# EAGLE board Bartosz_Nowakowski (EAGLE 9.6.0)
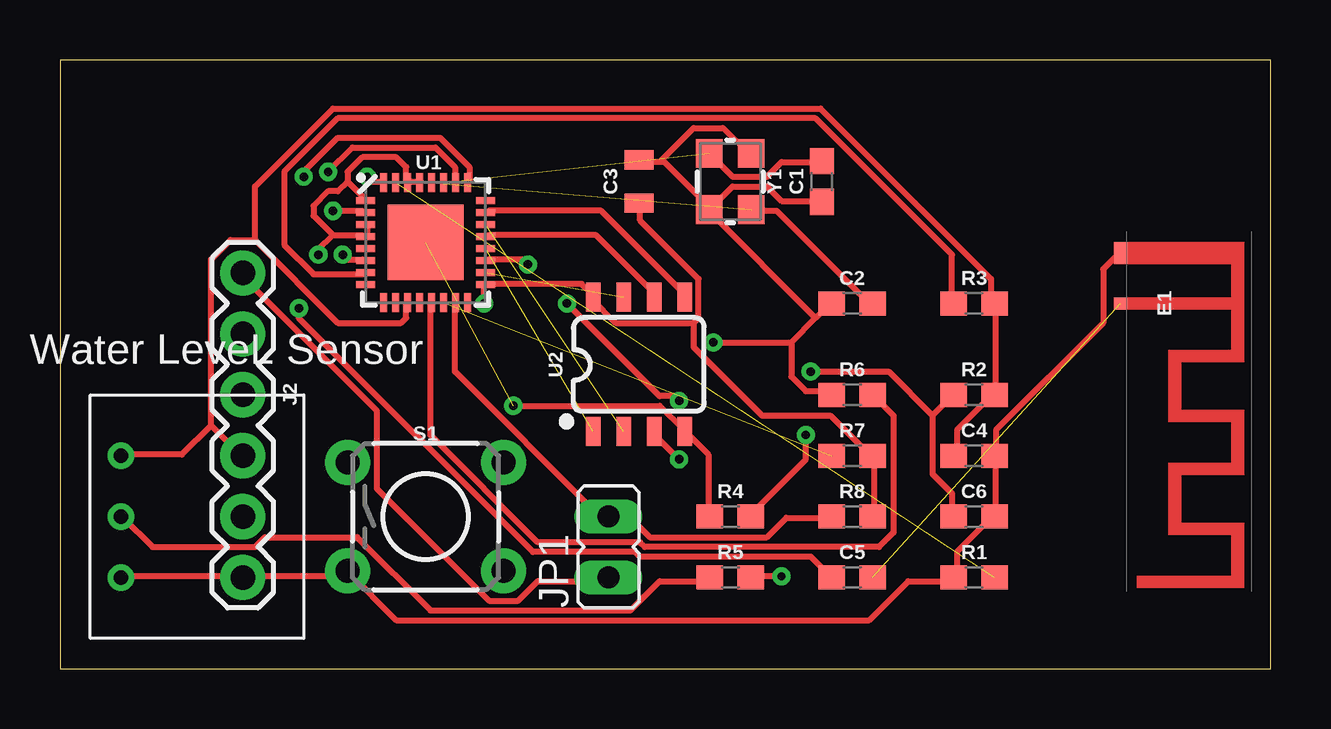
[diagram p0: board, top side]
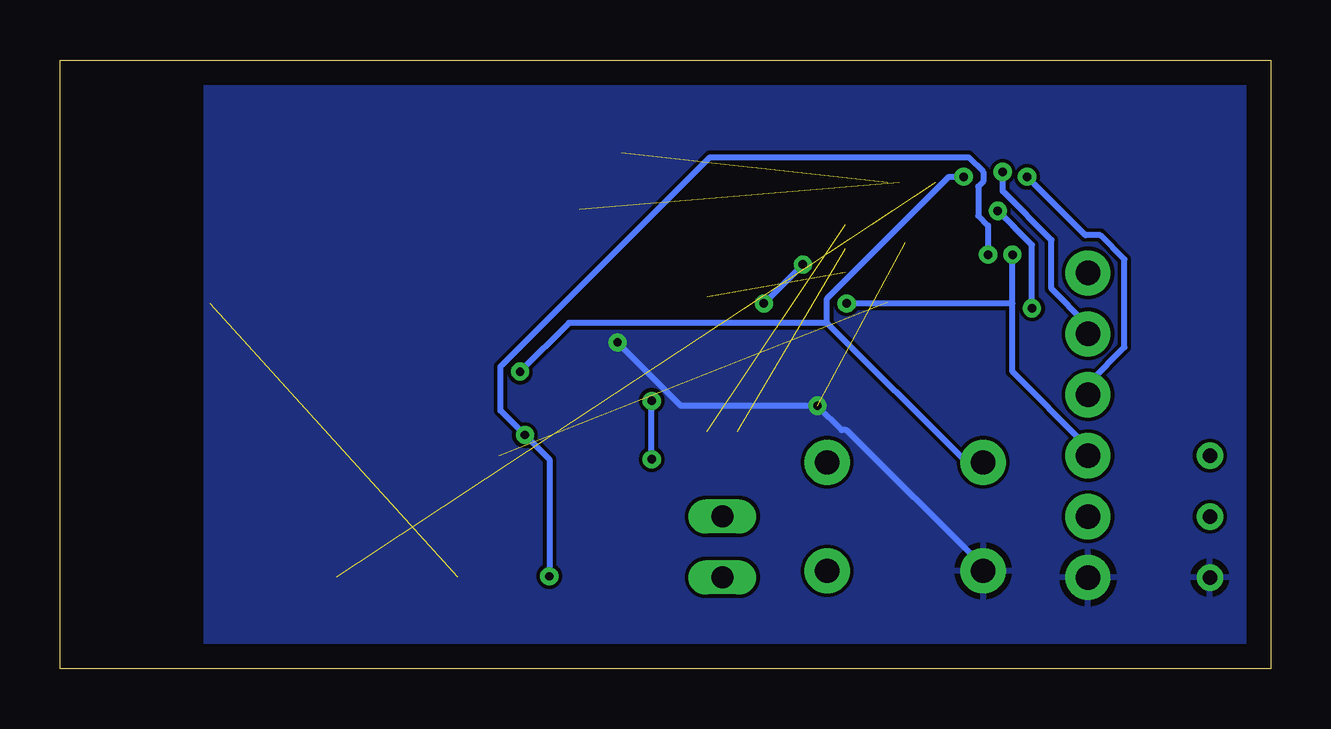
[diagram p1: board, bottom side, seen from below]

Size 50.47 x 25.39 mm. Coordinates in mm from the lower left corner, seen from the top.
Outline: 0,0 50.47,0 50.47,25.39 0,25.39 0,0
Copper layers (1*16): Top 0.035mm / dielectric 1.5mm / Bottom 0.035mm
Design rules "default *": minimum track width 10mil, minimum drill 0.35mm, track to track 6mil, track to pad 6mil, pad to pad 6mil, via to via 6mil, smd to smd 6mil, copper to edge 40mil, drill to drill 6mil, minimum pad ring 10mil, minimum via ring 8mil, stop-mask expansion 4mil, vias tented up to drill 0mil, thermal gap 10mil

## Footprints (pad centres in the part's own frame; a part is rotated, then mirrored left to right if it is on the bottom)
0603 = smd 1.1 x 1: 1 -0.85,0; 2 0.85,0
0805 = smd 0.8 x 1.2: 1 -0.9,0; 2 0.9,0
TRACE_ANTENNA_2.4GHZ_15.2MM = smd 0.5 x 0.5: ANT 0,-0.25 | smd 0.9 x 0.5: GND -2.1,-0.25
FTDI_BASIC = drill 1.016 pad 1.88: CTS 10.16,0; DTR 0,0; GND 12.7,0; RXI 2.54,0; TXO 5.08,0; VCC 7.62,0
JP1 = drill 0.914 long: 1 0,-1.27; 2 0,1.27
TACTILE_SWITCH_PTH_6.0MM_KIT = drill 1.016 pad 1.88: 1 -3.251,2.261; 2 3.251,2.261; 3 -3.251,-2.261; 4 3.251,-2.261
QFN32-5X5MM = smd 0.8 x 0.285: 1 -2.5,1.75; 2 -2.5,1.25; 3 -2.5,0.75; 4 -2.5,0.25; 5 -2.5,-0.25; 6 -2.5,-0.75; 7 -2.5,-1.25; 8 -2.5,-1.75; 17 2.5,-1.75; 18 2.5,-1.25; 19 2.5,-0.75; 20 2.5,-0.25; 21 2.5,0.25; 22 2.5,0.75; 23 2.5,1.25; 24 2.5,1.75 | smd 0.285 x 0.8: 9 -1.75,-2.5; 10 -1.25,-2.5; 11 -0.75,-2.5; 12 -0.25,-2.5; 13 0.25,-2.5; 14 0.75,-2.5; 15 1.25,-2.5; 16 1.75,-2.5; 25 1.75,2.5; 26 1.25,2.5; 27 0.75,2.5; 28 0.25,2.5; 29 -0.25,2.5; 30 -0.75,2.5; 31 -1.25,2.5; 32 -1.75,2.5 | smd 3.15 x 3.15: EP 0,0
SO08 = smd 0.6 x 1.2: 1 -1.905,-2.8; 2 -0.635,-2.8; 3 0.635,-2.8; 4 1.905,-2.8; 5 1.905,2.8; 6 0.635,2.8; 7 -0.635,2.8; 8 -1.905,2.8
WATERLEVELSENSORFT = drill 0.6: GND -7.62,-2.54; OUT -7.62,0; VCC -7.62,2.54
CRYSTAL-SMD-3.2X2.5MM = smd 1.2 x 1.1: 1 -1.175,-0.875; 2 1.175,-0.875; 3 1.175,0.875; 4 -1.175,0.875

## Placement (x,y rotation side)
C1  10pF  [0603]  31.75,20.32 90 top
C2  10pF  [0603]  33.02,15.24 0 top
C3  10uF  [0805]  24.13,20.32 90 top
C4  100pF  [0603]  38.1,8.89 0 top
C5  5.6PF  [0603]  33.02,3.81 0 top
C6  0.1uF  [0603]  38.1,6.35 0 top
E1  ANTENNA-GROUNDEDTRACE-15.2MM  [TRACE_ANTENNA_2.4GHZ_15.2MM]  44.45,15.24 270 top
J2  6_PIN_SERIAL_CABLEPTH  [FTDI_BASIC]  7.62,16.51 270 top
JP1  1  [JP1]  22.86,5.08 0 top
R1  12k  [0603]  38.1,3.81 0 top
R2  10k  [0603]  38.1,11.43 0 top
R3  10k  [0603]  38.1,15.24 0 top
R4  100k  [0603]  27.94,6.35 0 top
R5  220k  [0603]  27.94,3.81 0 top
R6  10k  [0603]  33.02,11.43 0 top
R7  12k  [0603]  33.02,8.89 0 top
R8  1k  [0603]  33.02,6.35 0 top
S1  MOMENTARY-SWITCH-SPST-PTH-6.0MM-KIT  [TACTILE_SWITCH_PTH_6.0MM_KIT]  15.24,6.35 0 top
U1  ESP8266  [QFN32-5X5MM]  15.24,17.78 0 top
U2  4MB Flash  [SO08]  24.13,12.7 0 top
WATER1  WATERLEVELSENORDEV  [WATERLEVELSENSORFT]  10.16,6.35 0 top
Y1  CRYSTAL-26MHZSMD-3.2X2.5  [CRYSTAL-SMD-3.2X2.5MM]  27.94,20.32 270 top

## Library data of the parts
C1 C2 = SparkFun-Capacitors; PROD_ID: CAP-11812
C3 = SparkFun-Capacitors; PROD_ID: CAP-11330
C4 = SparkFun-Capacitors; PROD_ID: CAP-07883
C5 = SparkFun-Capacitors; PROD_ID: CAP-12456
C6 = SparkFun-Capacitors; PROD_ID: CAP-08604
E1 = SparkFun-RF
J2 = SparkFun-Connectors
JP1 = jumper
R1 R7 = SparkFun-Resistors; PROD_ID: RES-10327
R2 R3 R6 = SparkFun-Resistors; PROD_ID: RES-00824
R4 = SparkFun-Resistors; PROD_ID: RES-07828
R5 = SparkFun-Resistors; PROD_ID: RES-08969
R8 = SparkFun-Resistors; PROD_ID: RES-07856
S1 = SparkFun-Switches; PROD_ID: SWCH-08441; SF_SKU: COM-00097
U1 = SparkFun-RF; PROD_ID: IC-12452
U2 = SparkFun-IC-Memory; PROD_ID: IC-12455
WATER1 = WaterLevel
Y1 = SparkFun-Clocks; PROD_ID: XTAL-12454

## Nets
+3V3: C3.1 C4.1 J2.VCC R2.2 R3.2 R7.2 R8.2 U1.1 U1.3 U1.4 U1.11 U1.17 U1.29 U1.30 U2.8 WATER1.VCC
GND: C1.1 C2.1 C3.2 C4.2 C6.2 E1.GND J2.GND R1.1 R4.1 R6.1 S1.3 U1.EP U2.4 WATER1.GND Y1.2 Y1.4
GPIO0: JP1.2 R8.1 U1.15
GPIO2: R7.1 U1.14
GPIO15: R6.2 U1.13
N$1: R1.2 U1.31
N$2: C1.2 U1.27 Y1.1
N$3: C2.2 U1.28 Y1.3
N$4: R3.1 U1.7
N$5: C6.1 R2.1 S1.1 U1.32
N$6: C5.1 U1.2
N$7: C5.2 E1.ANT
N$8: R4.2 R5.2 U1.6
N$9: R5.1 WATER1.OUT
N$10: J2.DTR JP1.1
SD_CLK: U1.21 U2.6
SD_CS0: U1.20 U2.1
SD_HD: U1.18 U2.7
SD_SI: U1.23 U2.5
SD_SO: U1.22 U2.2
SD_WP: U1.19 U2.3
U0RXI: J2.TXO U1.25
U0TXO: J2.RXI U1.26

## Tracks (layer width: path | path; a pad name or v marks a point on that pad's centre or on a via)
+3V3  (via drill 0.35)
  Top 0.254: R8.2 33.93,6.5 33.93,8.74 R7.2 33.73,8.94 32.11,10.57 29.26,10.57 26.42,13.41 26.42,14.43 | 26.42,14.43 26.62,14.63 26.62,16.26 24.18,18.69 24.18,19.3 C3.1 | 26.42,14.43 23.16,14.43 22.15,15.44 U2.8 22.15,15.65 21.74,16.05 17.88,16.05 U1.17 17.68,16.05 v17.68,15.24 | C4.1 37.39,8.94 37.39,9.96 38.81,11.38 R2.2 39.01,11.58 39.01,15.24 R3.2 38.81,15.24 38.81,16.26 31.7,23.37 11.38,23.37 8.13,20.12 8.13,17.88 | U1.3 12.8,18.49 12.8,18.09 U1.4 12.6,18.09 11.38,18.09 | 11.99,20.32 12.8,19.51 U1.1 | 11.99,20.32 11.99,20.73 12.6,21.34 14.02,21.34 14.43,20.93 14.43,20.32 U1.30 14.63,20.32 15.04,20.32 U1.29 | 11.38,18.09 10.57,18.9 10.57,19.3 11.18,19.91 11.58,19.91 11.99,20.32 | 8.13,17.88 11.58,14.43 14.22,14.43 14.43,14.63 14.43,15.24 U1.11 | 8.13,17.88 7.11,17.88 6.3,17.07 6.3,10.16 | 6.3,10.16 7.52,8.94 J2.VCC | 6.3,10.16 5.08,8.94 2.64,8.94 WATER1.VCC | 11.38,18.09 10.77,17.48 v10.77,17.27
  Bottom 0.254: 10.77,15.24 10.77,12.39 7.72,9.35 7.72,8.94 J2.VCC | 10.77,15.24 v10.77,17.27 | 10.77,15.24 v17.68,15.24
GND  (via drill 0.35)  (1 unrouted)
  Top 0.254: E1.GND 44.09,17.27 43.48,16.66 43.48,14.43 39.01,9.96 39.01,8.94 C4.2 39.01,8.74 39.01,6.5 C6.2 38.81,6.3 37.39,4.88 37.39,3.86 R1.1 37.19,3.66 35.36,3.66 33.73,2.03 14.02,2.03 11.99,4.06 | 30.48,13.61 30.48,12.19 31.09,11.58 32.11,11.58 R6.1 | 31.5,14.63 32.11,15.24 C2.1 | 31.5,14.63 30.48,13.61 | C1.1 31.7,19.51 30.07,19.51 29.46,20.12 28.04,20.12 27.23,19.3 Y1.2 | 24.99,21.13 25.2,21.13 27.03,19.3 Y1.2 | 24.99,21.13 24.18,21.13 C3.2 | 24.99,21.13 26.42,22.55 27.64,22.55 28.65,21.54 Y1.4 | 31.5,14.63 27.03,19.1 Y1.2 | WATER1.GND 2.64,3.86 7.52,3.86 J2.GND 7.72,3.86 11.79,3.86 11.99,4.06 | R4.1 27.03,6.5 27.03,8.94 26.21,9.75 U2.4 26.01,9.96 24.99,10.97 v18.9,10.97 | v27.23,13.61 30.48,13.61 | 11.99,4.06 S1.3
  Bottom 0.254: S1.3 11.99,4.27 17.68,9.96 17.88,9.96 v18.9,10.97 24.59,10.97 v27.23,13.61
  pour Bottom: 0,25.4 0,0 44.45,0 44.45,25.4
GPIO0
  Top 0.254: U1.15 16.46,15.24 16.46,12.39 22.35,6.5 22.76,6.5 JP1.2 22.96,6.3 23.77,6.3 24.59,5.49 29.46,5.49 30.28,6.3 32.11,6.3 R8.1
GPIO2  (1 unrouted)
GPIO15
  Top 0.254: U1.13 15.44,15.24 15.44,9.75 19.91,5.28 24.18,5.28 24.38,5.08 34.14,5.08 34.75,5.69 34.75,10.57 33.93,11.38 R6.2
N$1  (1 unrouted)
N$2  (1 unrouted)
  Top 0.254: C1.2 31.7,21.13 30.07,21.13 29.46,20.52 28.04,20.52 27.23,21.34 Y1.1
N$3  (1 unrouted)
  Top 0.254: C2.2 33.73,15.24 29.87,19.1 28.85,19.1 Y1.3
N$4
  Top 0.254: U1.7 12.6,16.46 10.57,16.46 9.35,17.68 9.35,20.73 11.58,22.96 31.5,22.96 37.19,17.27 37.19,15.24 R3.1
N$5  (via drill 0.35)
  Top 0.254: 36.37,10.57 36.37,8.13 37.19,7.32 37.19,6.5 C6.1 | 36.37,10.57 37.19,11.38 R2.1 | v12.8,20.52 13.01,20.32 13.41,20.32 U1.32 | 36.37,10.57 34.54,12.39 v31.29,12.39
  Bottom 0.254: v12.8,20.52 13.41,20.52 18.49,15.44 18.49,14.43 | 18.49,14.43 12.8,8.74 11.99,8.74 S1.1 | v31.29,12.39 29.26,14.43 18.49,14.43
N$6  (via drill 0.35)
  Top 0.254: v11.38,19.1 12.6,19.1 U1.2 | v9.96,15.04 9.96,14.63 19.71,4.88 23.98,4.88 24.18,4.67 31.29,4.67 32.11,3.86 C5.1
  Bottom 0.254: v11.38,19.1 9.96,17.68 v9.96,15.04
N$7  (1 unrouted)
N$8  (via drill 0.35)
  Top 0.254: v11.79,17.27 11.99,17.07 12.6,17.07 U1.6 | v31.09,9.75 31.09,8.74 28.85,6.5 R4.2 | v30.07,3.86 28.85,3.86 R5.2
  Bottom 0.254: v11.79,17.27 11.79,18.49 12.19,18.9 12.19,20.12 11.99,20.32 11.99,20.73 12.6,21.34 23.37,21.34 32.11,12.6 32.11,10.77 v31.09,9.75 30.07,8.74 v30.07,3.86
N$9
  Top 0.254: R5.1 27.03,3.66 24.99,3.66 23.77,2.44 15.44,2.44 12.39,5.49 8.53,5.49 8.13,5.08 3.86,5.08 2.64,6.3 WATER1.OUT
N$10
  Top 0.254: JP1.1 22.76,3.66 19.91,3.66 19.1,2.85 17.88,2.85 13.21,7.52 13.21,10.77 7.52,16.46 J2.DTR
SD_CLK
  Top 0.254: U1.21 17.88,18.09 22.35,18.09 24.79,15.65 U2.6
SD_CS0  (1 unrouted)
SD_HD  (1 unrouted)
SD_SI
  Top 0.254: U1.23 17.88,19.1 22.55,19.1 26.01,15.65 U2.5
SD_SO  (1 unrouted)
SD_WP  (via drill 0.35)
  Top 0.254: v19.51,16.87 19.3,17.07 17.88,17.07 U1.19 | v21.13,15.24 24.99,11.38 25.6,11.38 v25.81,11.18 | v25.81,8.74 24.79,9.75 U2.3
  Bottom 0.254: v21.13,15.24 v19.51,16.87 | v25.81,8.74 v25.81,11.18
U0RXI  (via drill 0.35)
  Top 0.254: v10.16,20.52 10.16,20.73 11.58,22.15 15.85,22.15 17.07,20.93 17.07,20.32 U1.25
  Bottom 0.254: v10.16,20.52 7.72,18.09 7.11,18.09 6.1,17.07 6.1,13.41 7.52,11.99 7.52,11.58 J2.TXO
U0TXO  (via drill 0.35)
  Top 0.254: v11.18,20.73 12.19,21.74 15.65,21.74 16.46,20.93 16.46,20.32 U1.26
  Bottom 0.254: v11.18,20.73 11.18,19.91 9.14,17.88 9.14,15.85 7.72,14.43 7.72,14.02 J2.RXI